# Altium PCB NucleoClone.PcbDoc (part 1 of 3)
Units mm, origin at the board's own origin, x right, y up, seen from the top; angles counter-clockwise.
Board outline 100 x 100 mm, 4 copper layers (Top Layer, Signal Layer 2, Signal Layer 1, Bottom Layer), stack 0.778 mm thick; 118 components, 177 nets, 571 pads, 394 vias.
Unrouted connection lines stored in the file: 5.
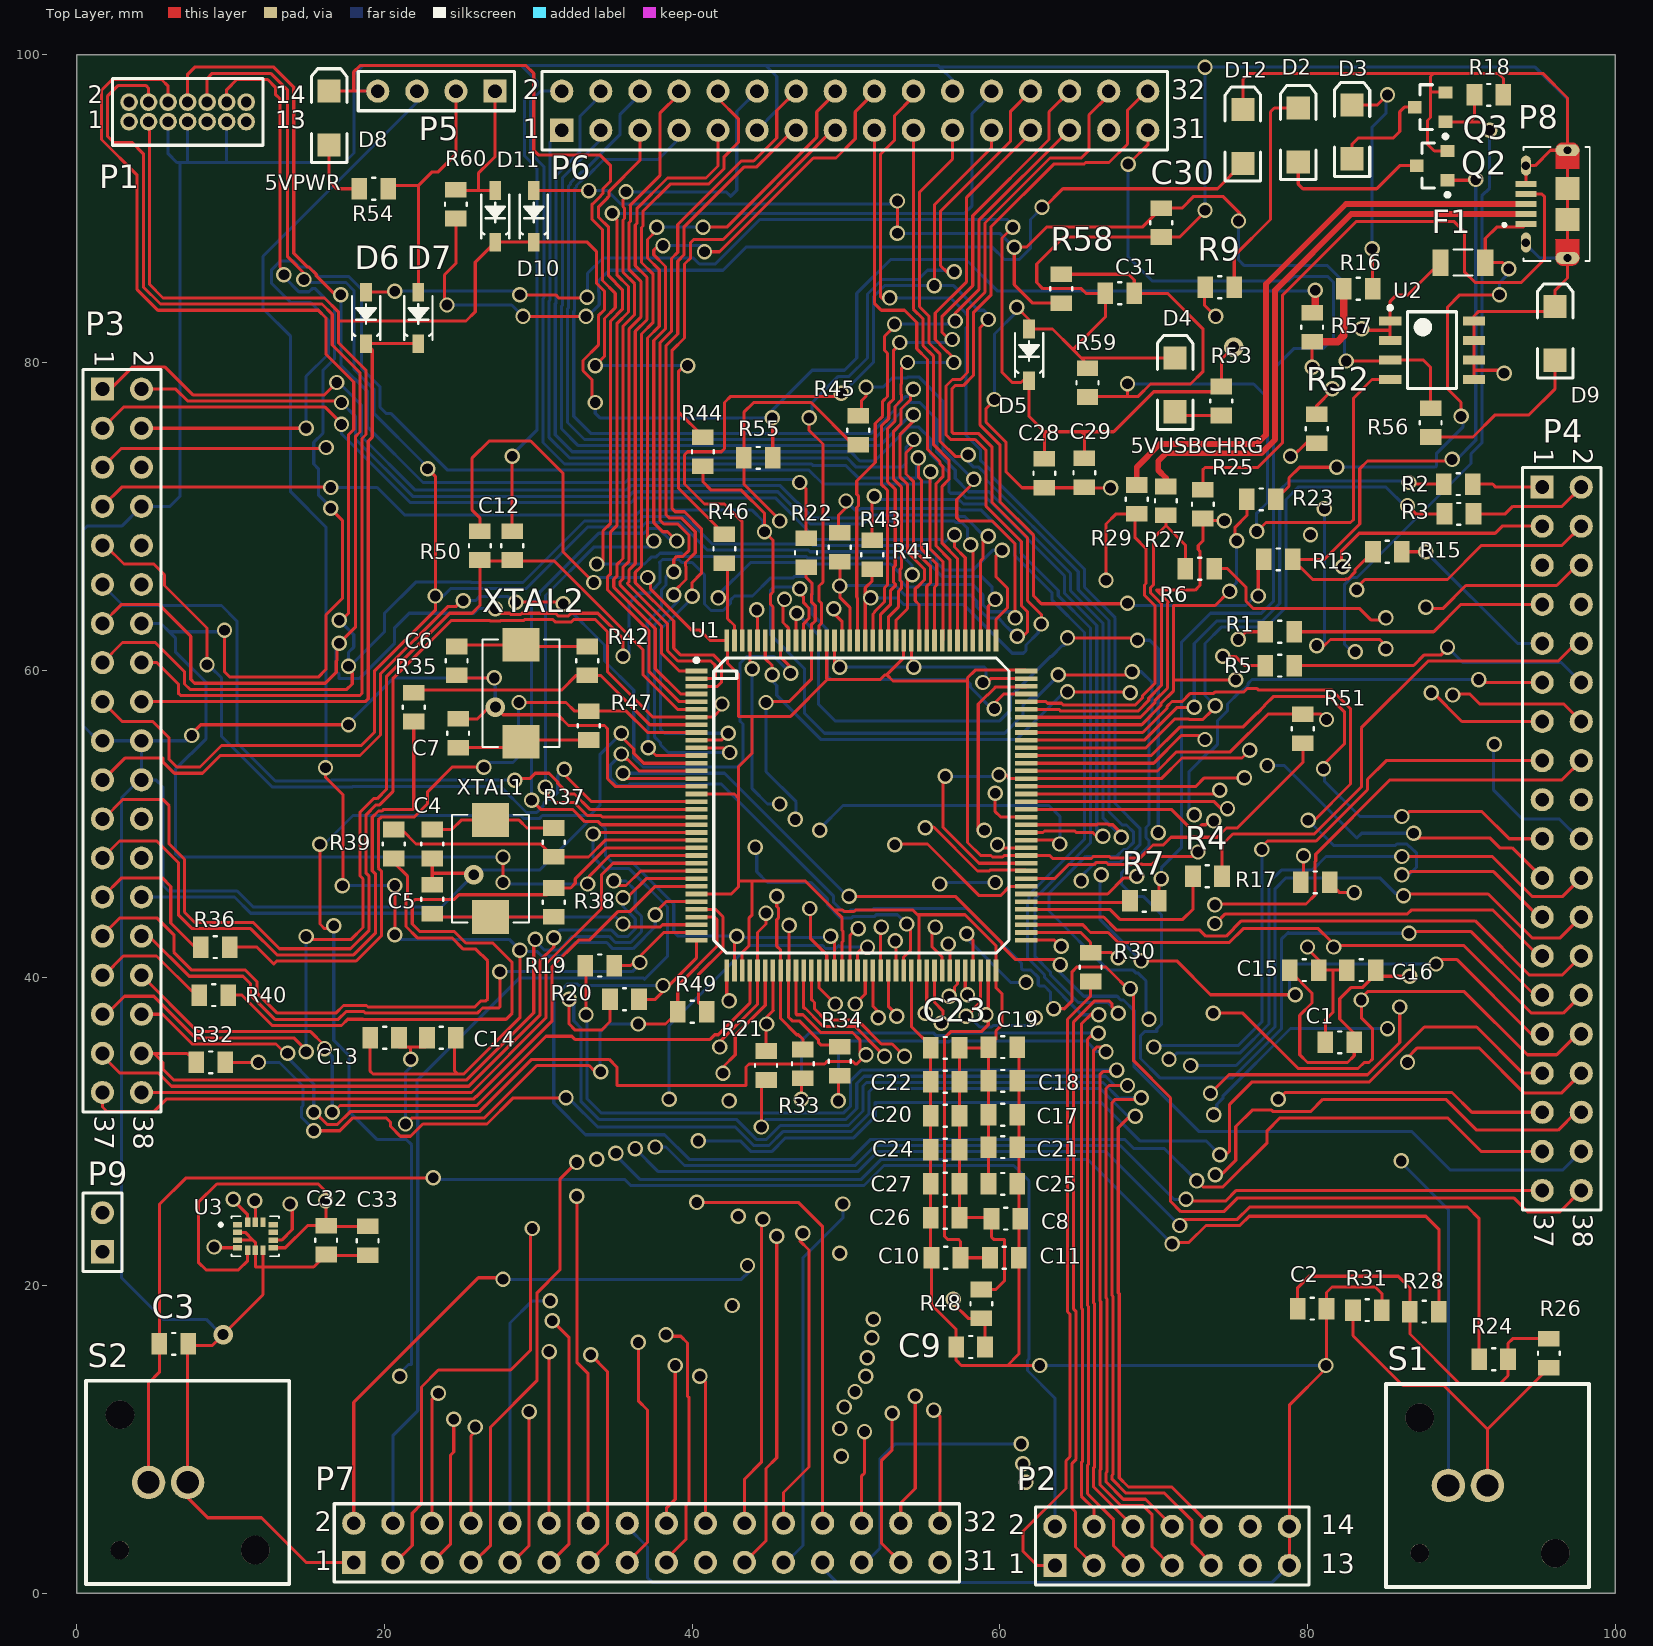
[diagram p0: Top Layer view]
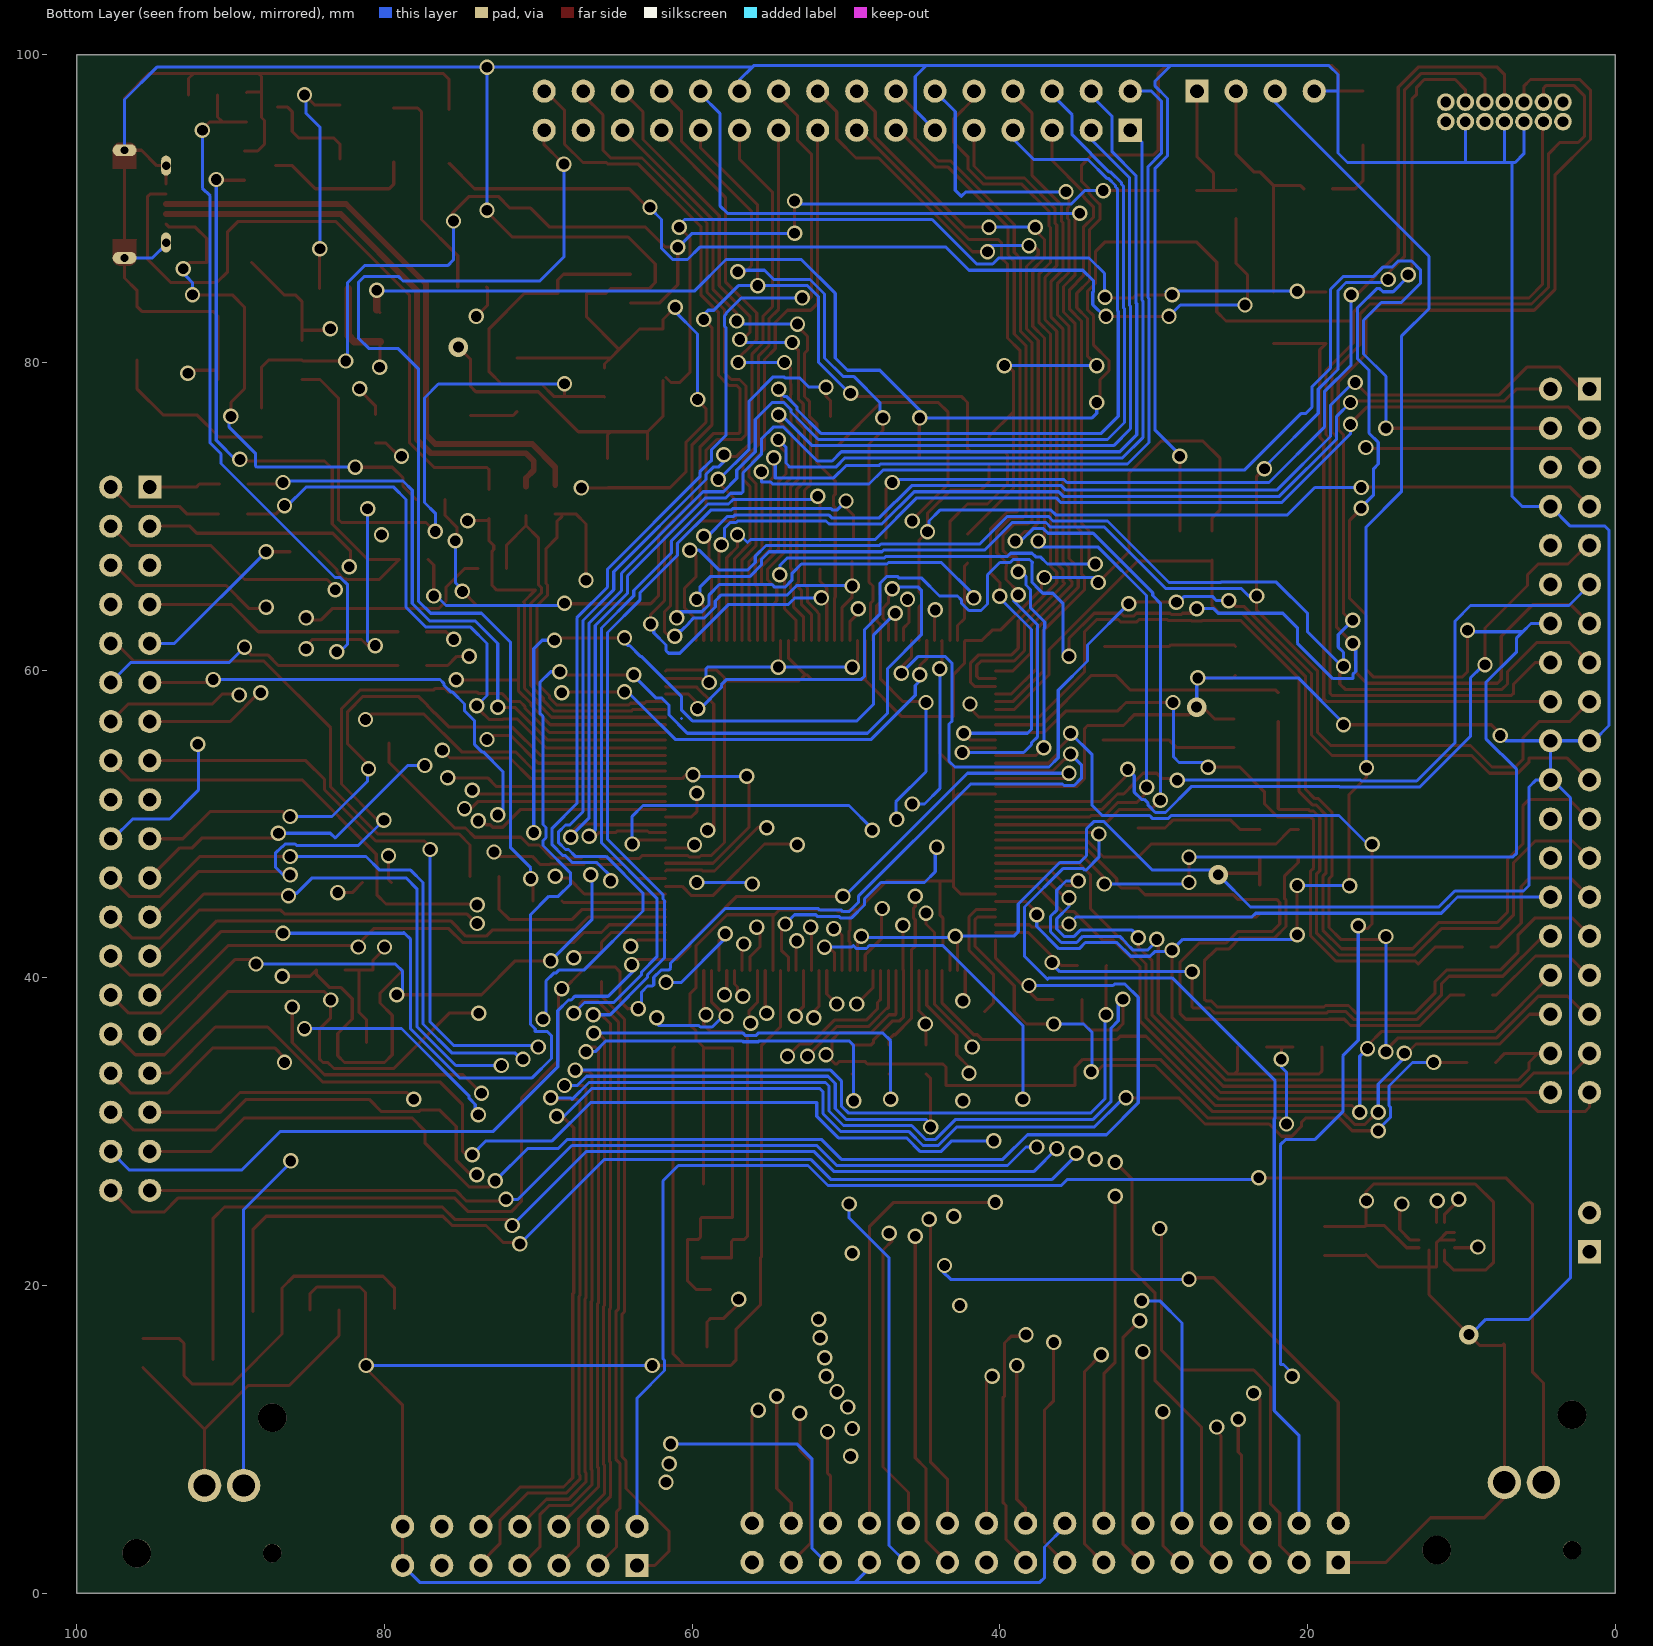
[diagram p1: Bottom Layer view, seen from below]
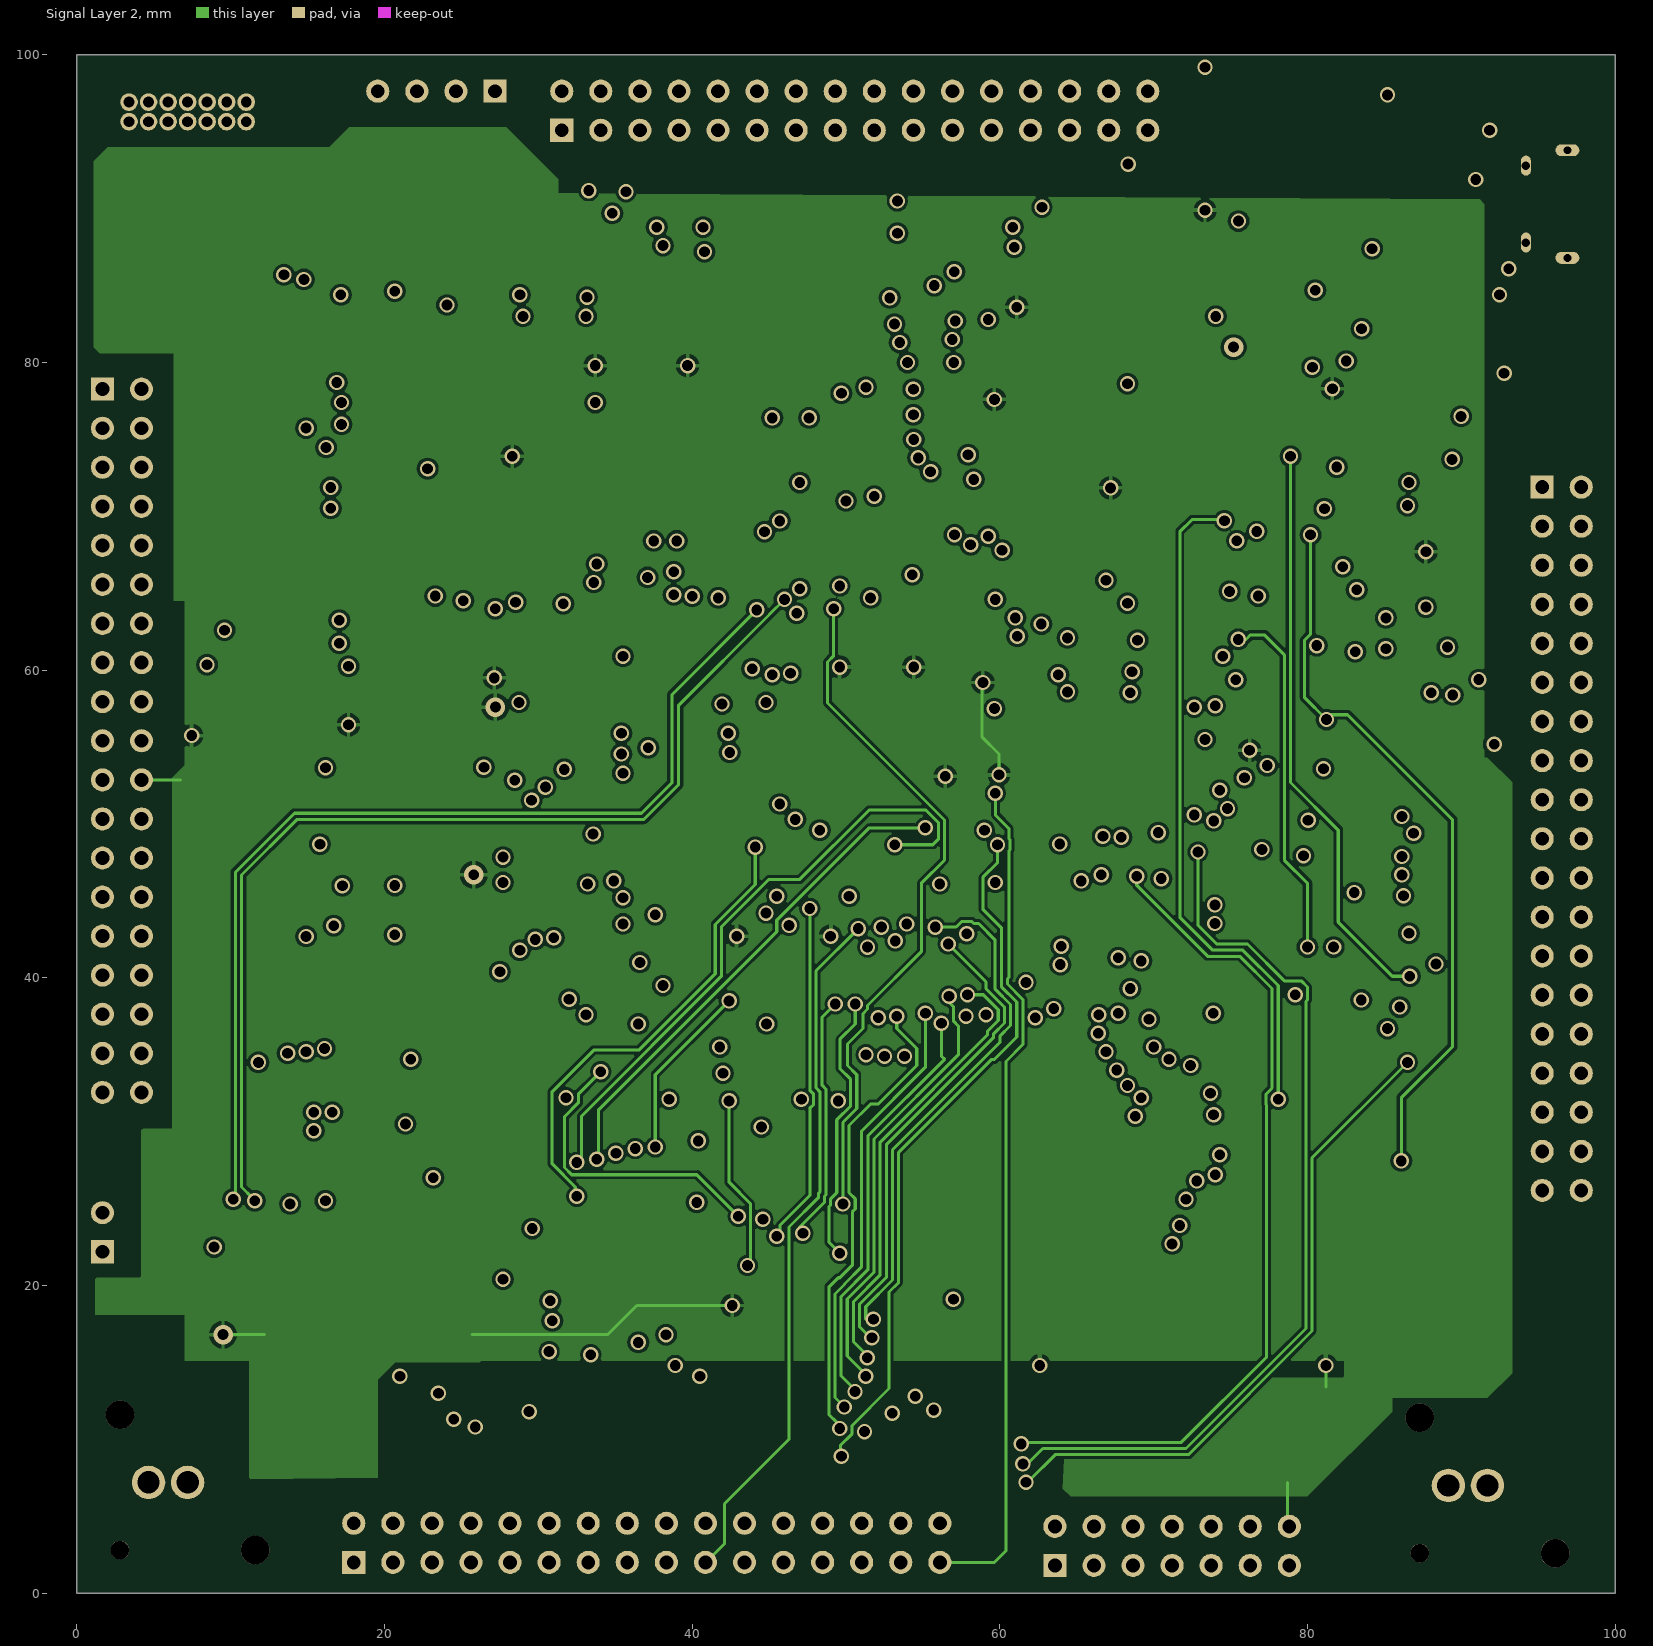
[diagram p2: Signal Layer 2]
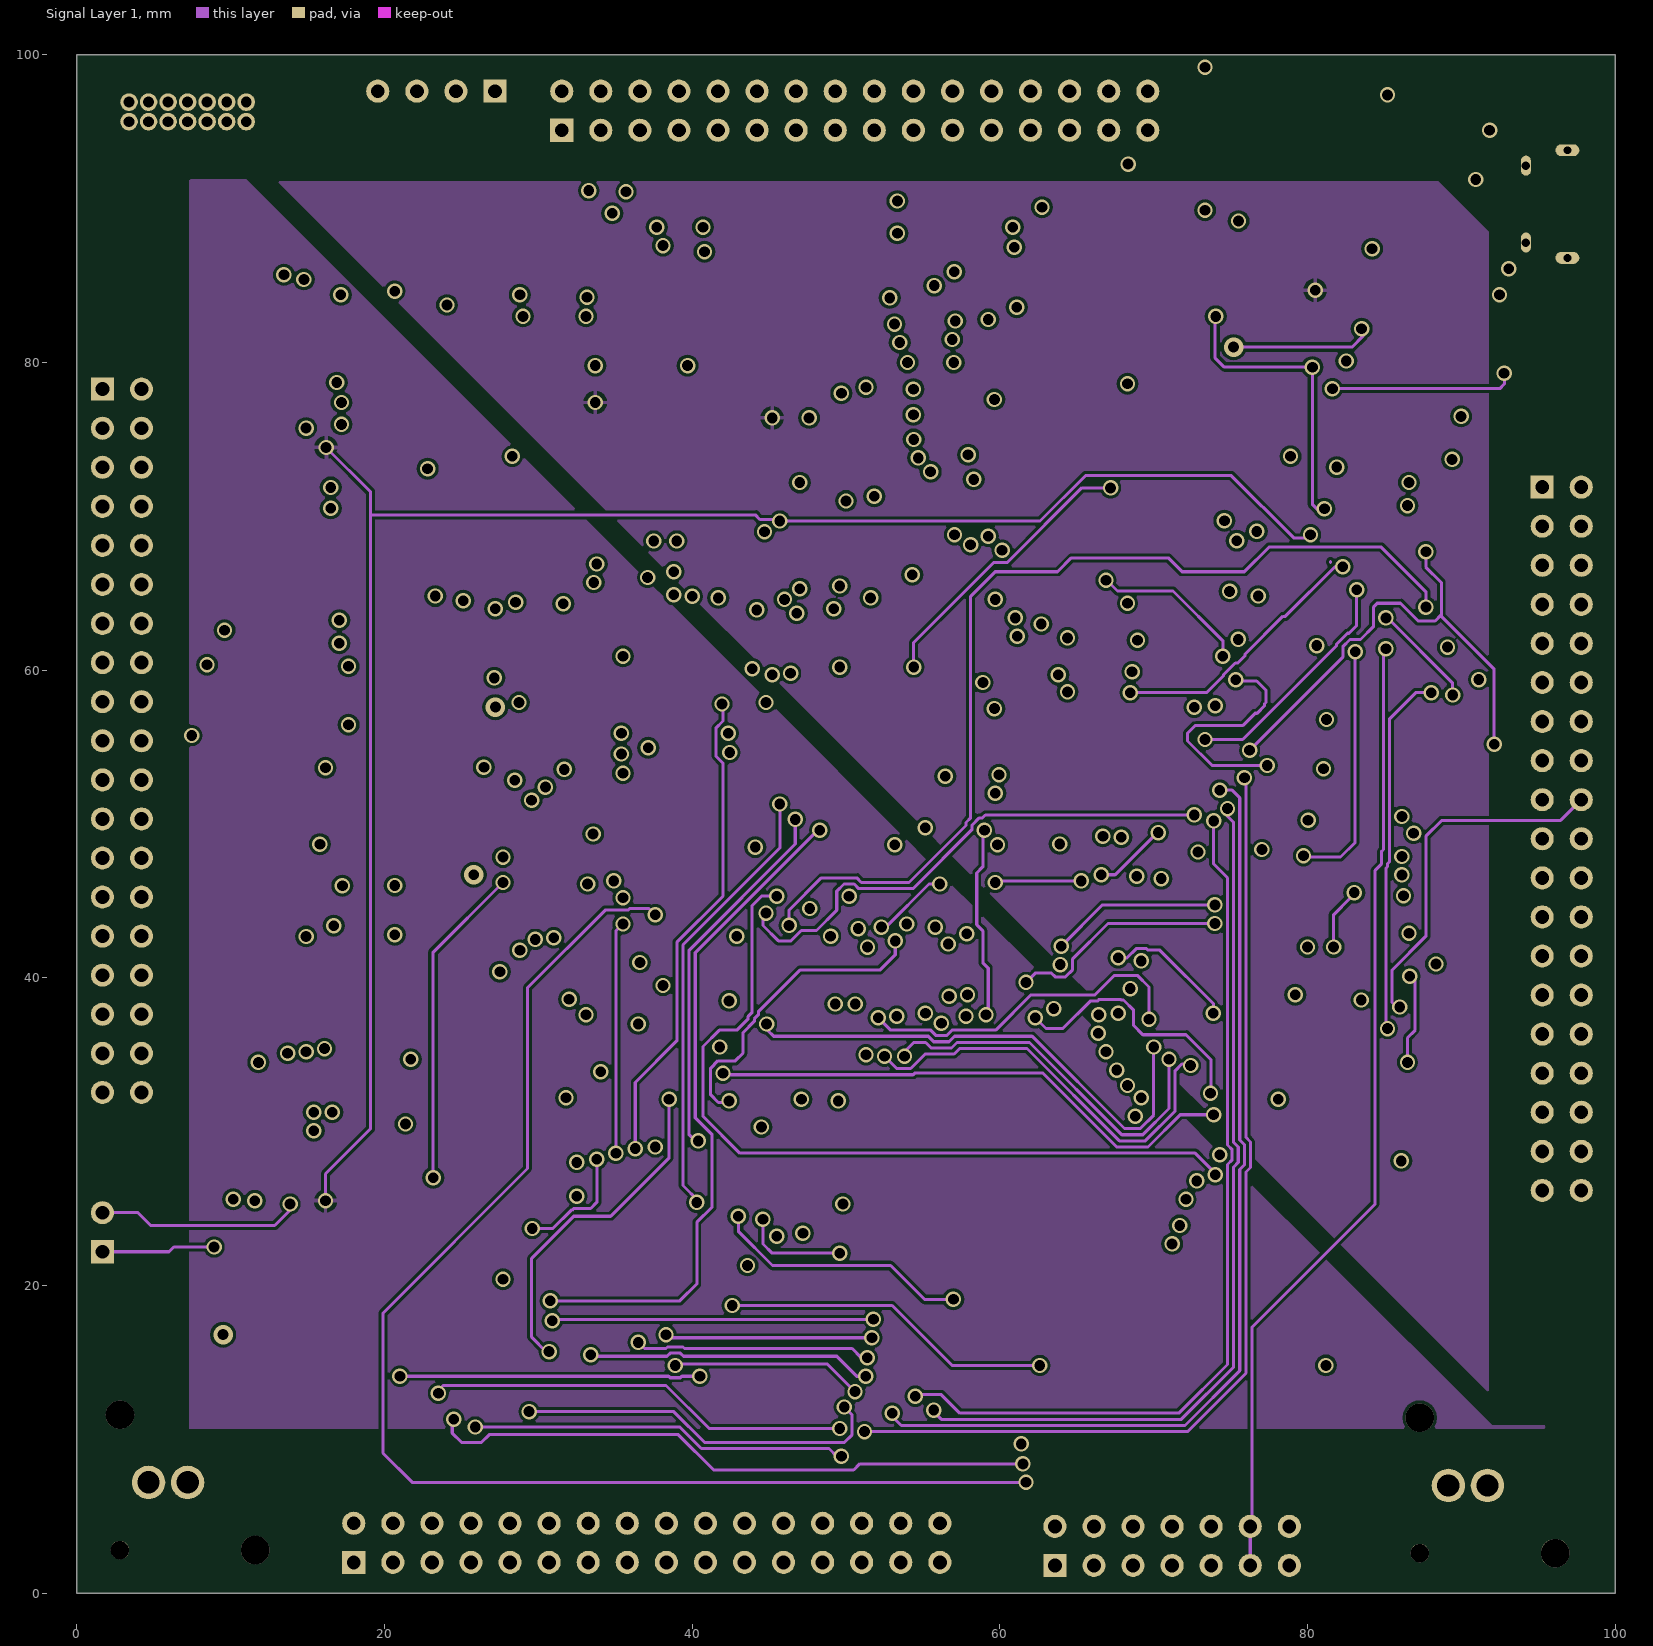
[diagram p3: Signal Layer 1]

## Layer stack, top to bottom
Top Solder: solder mask 0.0102, Solder Resist, Dk 3.5
Top Layer: signal copper 0.0356
Dielectric 1: core 0.254, FR-4, Dk 4.2
Signal Layer 2: signal copper 0.036
Dielectric 3: prepreg 0.127, Dk 4.2
Signal Layer 1: signal copper 0.036
Dielectric 2: core 0.254, Dk 4.2
Bottom Layer: signal copper 0.0356
Bottom Solder: solder mask 0.0102, Solder Resist, Dk 3.5

## Board outline
0,0 100,0 100,100 0,100

## Design rules (kind name [scope] priority, off if disabled: settings)
Clearance [All] p1: gap=0.2 ignorepadtopadclearanceinfootprint=FALSE except(0: Arc-Hole Track-Hole SMDPad-Hole THPad-Hole Via-Hole Fill-Hole Poly-Hole Region-Hole Text-Hole; 0.127: Arc-Arc Arc-Track Arc-SMDPad Arc-THPad Arc-Via Track-Track Track-SMDPad Track-THPad Track-Via SMDPad-SMDPad SMDPad-THPad SMDPad-Via THPad-THPad THPad-Via Via-Via)
DiffPairsRouting [All] p1: maxlimit=0.254 minlimit=0.254 mostfreqgap=0.254 toplayer_minwidth=0.381 toplayer_maxwidth=0.381 toplayer_prefwidth=0.381 midlayer1_minwidth=0.381 midlayer1_maxwidth=0.381 midlayer1_prefwidth=0.381 midlayer2_minwidth=0.381 midlayer2_maxwidth=0.381 midlayer2_prefwidth=0.381 bottomlayer_minwidth=0.381 bottomlayer_maxwidth=0.381 bottomlayer_prefwidth=0.381 maxuncoupledlength=12.7
MinimumSolderMaskSliver [All] p1: minsoldermaskwidth=0.021
PolygonConnect [All] p1: connectstyle=Relief reliefconductorwidth=0.254 reliefentries=4 polygonreliefangle="90 Angle" airgapwidth=0.254
RoomDefinition U_USB [InComponentClass('U_USB')] p1: confinementstyle=ConfineIn formatcopy=TRUE lockcomponents=FALSE outline -25.4,-25.4 25.4,-25.4 25.4,0 -25.4,0
RoomDefinition U_Power_Board [InComponentClass('U_Power_Board')] p2: confinementstyle=ConfineIn formatcopy=TRUE lockcomponents=FALSE outline 102.262,83.648 264.441,83.648 264.441,100.92 102.262,100.92
RoomDefinition U_MCU_144_POWER [InComponentClass('U_MCU_144_POWER')] p3: confinementstyle=ConfineIn formatcopy=TRUE lockcomponents=FALSE outline 0.895,108.1 168.916,108.1 168.916,125.372 0.895,125.372
RoomDefinition U_MCU_144_IOs [InComponentClass('U_MCU_144_IOs')] p4: confinementstyle=ConfineIn formatcopy=TRUE lockcomponents=FALSE outline 102.686,56.529 380.689,56.529 380.689,82.945 102.686,82.945
RoomDefinition U_Connectors [InComponentClass('U_Connectors')] p5: confinementstyle=ConfineIn formatcopy=TRUE lockcomponents=FALSE outline 102.686,0.014 236.925,0.014 236.925,55.259 102.686,55.259
RoutingVias [All] p1: holewidth=0.711 width=1.27 viastyle="Through Hole" minholewidth=0.711 minwidth=1.27 maxholewidth=0.711 maxwidth=1.27
SilkToSilkClearance [All] p1: silktosilkclearance=0.05
SilkToSolderMaskClearance [IsPad] p1: minsilkscreentomaskgap=0.1 clearancetoexposedcopper=TRUE
SolderMaskExpansion [All] p1: expansion=0.102
Width [All] p1: maxlimit=1 minlimit=0.2 preferedwidth=0.2
26 further rules are at their usual default settings.

## Classes and differential pairs
net class PH[0..1]: PH0 PH1
net class PG[0..15]: PG0 PG1 PG2 PG3 PG4 PG5 PG6 PG7 PG8 PG9 PG10 PG11 PG12 PG13 PG14 PG15
net class PF[0..15]: PF0 PF1 PF2 PF3 PF4 PF5 PF6 PF7 PF8 PF9 PF10 PF11 PF12 PF13 PF14 PF15
net class PE[0..15]: PE0 PE1 PE2 PE3 PE4 PE5 PE6 PE7 PE8 PE9 PE10 PE11 PE12 PE13 PE14 PE15
net class PD[0..15]: PD0 PD1 PD2 PD3 PD4 PD5 PD6 PD7 PD8 PD9 PD10 PD11 PD12 PD13 PD14 PD15
net class PC[0..15]: PC0 PC1 PC2 PC3 PC4 PC5 PC6 PC7 PC8 PC9 PC10 PC11 PC12 PC13 PC14 PC15
net class PB[0..15]: PB0 PB1 PB2 PB3 PB4 PB5 PB7 PB8 PB10 PB11 PB12 PB13 PB14 PB15
net class PA[0..15]: PA0 PA1 PA2 PA3 PA4 PA5 PA6 PA7 PA8 PA9 PA10 PA11 PA12 PA13 PA14 PA15
component class U_USB: CN1 P9
component class U_Power_Board: C28 C29 C30 C31 D4 D5 D6 D7 D8 D9 D10 D11 D12 F1 R53 R54 R55 R56 R57 R58 R59 R60 TP2 U2
component class U_MCU_144_POWER: C8 C9 C10 C11 C12 C13 C14 C15 C16 C17 C18 C19 C20 C21 C22 C23 C24 C25 C26 C27 C32 C33 R48 R49 R50 R51 R52
component class U_MCU_144_IOs: C2 C3 C4 C5 C6 C7 HW1 HW2 P9 R19 R20 R21 R22 R23 R24 R25 R26 R27 R28 R29 R30 R31 R32 R33 R34 R35 R36 R37 R38 R39 R40 R41 R42 R43 R44 R45 R46 R47 S1 S2 TP1 U1 U3 XTAL1 XTAL2
component class U_Connectors: C1 D2 D3 P1 P2 P3 P4 P5 P6 P7 Q1 Q2 Q3 R1 R2 R3 R4 R5 R6 R7 R9 R10 R12 R13 R15 R16 R17 R18
differential pair USB_FS: +USB_FS_P -USB_FS_N

## Components (designator, comment, footprint, x,y, rotation, side; value= is the part's Value field where it differs from the comment)
C1 "100nF" 0805 82.1,35.8 r180 top
C2 "100nF" 0805 80.3,18.5 r0 top
C3 "100nF" 0805 6.3,16.2 r180 top
C4 "5.6pF" 0805 23.1,48.7 r270 top
C5 "5.6pF" 0805 23.1,45.1 r90 top
C6 "5.1pF" 0805 24.68,60.6 r270 top
C7 "5.1pF" 0805 24.78,55.9 r90 top
C8 "100nF" 0805 60.4,24.345 r180 top
C9 "100nF" 0805 58.1,16 r0 top
C10 "2.2uF" 0805 56.5,21.8 r0 top
C11 "2.2uF" 0805 60.3,21.8 r180 top
C12 "1uF" 0805 28.3,68.1 r270 top
C13 "1uF" 0805 20,36.1 r0 top
C14 "100nF" 0805 23.7,36.1 r180 top
C15 "1uF" 0805 79.8,40.5 r0 top
C16 "100nF" 0805 83.5,40.5 r180 top
C17 "4.7uF" 0805 60.2,31.1 r180 top
C18 "100nF" 0805 60.2,33.3 r180 top
C19 "100nF" 0805 60.2,35.5 r180 top
C20 "100nF" 0805 56.443,31.029 r0 top
C21 "100nF" 0805 60.2,29 r180 top
C22 "100nF" 0805 56.443,33.238 r0 top
C23 "100nF" 0805 56.443,35.446 r0 top
C24 "100nF" 0805 56.443,28.821 r0 top
C25 "100nF" 0805 60.2,26.6 r180 top
C26 "100nF" 0805 56.443,24.405 r0 top
C27 "100nF" 0805 56.443,26.613 r0 top
C28 "1nF" 0805 62.9,72.8 r90 top
C29 "1uF" 0805 65.5,72.84 r270 top
C30 "2.2uF" 0805 70.5,89.1 r90 top
C31 "470pF" 0805 67.8,84.5 r0 top
C32 "100nF" 0805 16.2,22.95 r90 top
C33 "100nF" 0805 18.9,22.9 r90 top
D2 "LED2" 3.2X1.6X1.1 79.4,94.8 r90 top
D3 "LED2" 3.2X1.6X1.1 82.9,95 r90 top
D4 "LED2" 3.2X1.6X1.1 71.4,78.55 r90 top
D5 "MMSZ5245B-TP" SOD-123 61.9,80.5 r90 top
D6 "SM5817PL-TP" SOD-123 18.8,82.9 r90 top
D7 "SM5817PL-TP" SOD-123 22.2,82.9 r90 top
D8 "LED2" 3.2X1.6X1.1 16.4,95.9 r90 top
D9 "LED2" 3.2X1.6X1.1 96.1,81.9 r90 top
D10 "SM5817PL-TP" SOD-123 29.7,89.5 r90 top
D11 "SM5817PL-TP" SOD-123 27.2,89.5 r90 top
D12 "LED2" 3.2X1.6X1.1 75.8,94.7 r90 top
F1 "Fuse 3A 1206" 1206 90.1,86.5 r180 top
P1 "FTSH-107-01-L-D-K" "CN HDR JTAG" 7.2,96.3 r0 top
P2 "Header 7X2" HDR2X7 63.58,1.8 r0 top
P3 "Header 19X2" HDR2X19 1.66,78.27 r270 top
P4 "Header 19X2" HDR2X19 95.26,71.9 r270 top
P5 "Header 4" HDR1X4 27.18,97.64 r180 top
P6 "Header 16X2" HDR2X16 31.52,95.1 r0 top
P7 "Header 16X2" HDR2X16 18,2 r0 top
P8 "10118194-0001LF" "USB Micro B Receptacle" 96.89,90.3 r90 top
P9 "Header 2" HDR1X2 1.66,22.19 r90 top
Q2 "BSR14" ONSC-SOT-23-3-318-08_V 88.1,92.8 r180 top
Q3 "BSR14" ONSC-SOT-23-3-318-08_V 87.97,96.6 r180 top
R1 "JUMPER" 0805 78.2,62.5 r0 top value=0
R2 "JUMPER" 0805 89.8,72.1 r180 top value=0
R3 "JUMPER" 0805 89.85,70.16 r0 top value=0
R4 "JUMPER" 0805 73.5,46.6 r0 top value=0
R5 "JUMPER" 0805 78.2,60.3 r0 top value=0
R6 "JUMPER" 0805 73,66.6 r0 top value=0
R7 "JUMPER" 0805 69.4,45 r180 top value=0
R9 "270" 0805 74.3,84.9 r0 top
R12 "47k" 0805 78.1,67.2 r180 top
R15 "100k" 0805 85.2,67.7 r0 top
R16 "270" 0805 83.3,84.8 r0 top
R17 "47k" 0805 80.5,46.2 r0 top
R18 "100k" 0805 91.8,97.4 r0 top
R19 "JUMPER" 0805 34,40.8 r180 top value=0
R20 "JUMPER" 0805 35.6,38.6 r180 top value=0
R21 "JUMPER" 0805 44.8,34.3 r270 top value=0
R22 "JUMPER" 0805 47.4,67.64 r270 top value=0
R23 "JUMPER" 0805 77,71.1 r0 top value=0
R24 "JUMPER" 0805 92.1,15.2 r180 top value=0
R25 "JUMPER" 0805 73.2,70.8 r90 top value=0
R26 "330" 0805 95.7,15.6 r90 top
R27 "JUMPER" 0805 70.8,71 r90 top value=0
R28 "JUMPER" 0805 87.6,18.3 r0 top value=0
R29 "JUMPER" 0805 68.9,71.1 r90 top value=0
R30 "JUMPER" 0805 65.9,40.7 r90 top value=0
R31 "100k" 0805 83.9,18.4 r0 top
R32 "JUMPER" 0805 8.7,34.5 r0 top value=0
R33 "JUMPER" 0805 47.2,34.4 r270 top value=0
R34 "JUMPER" 0805 49.6,34.568 r270 top value=0
R35 "JUMPER" 0805 21.9,57.6 r270 top value=0
R36 "JUMPER" 0805 9,42 r180 top value=0
R37 "JUMPER" 0805 31,48.8 r270 top value=0
R38 "JUMPER" 0805 31,44.9 r90 top value=0
R39 "JUMPER" 0805 20.6,48.7 r90 top value=0
R40 "JUMPER" 0805 8.9,38.88 r0 top value=0
R41 "JUMPER" 0805 51.7,67.5 r90 top value=0
R42 "JUMPER" 0805 33.18,60.6 r270 top value=0
R43 "JUMPER" 0805 49.6,68 r90 top value=0
R44 "10k" 0805 40.7,74.2 r270 top
R45 "10k" 0805 50.8,75.6 r90 top
R46 "10k" 0805 42.1,67.9 r270 top
R47 "JUMPER" 0805 33.28,56.4 r90 top value=0
R48 "JUMPER" 0805 58.8,18.8 r90 top value=0
R49 "JUMPER" 0805 40,37.8 r180 top value=0
R50 "JUMPER" 0805 26.2,68.1 r90 top value=0
R51 "JUMPER" 0805 79.7,56.2 r90 top value=0
R52 "JUMPER" 0805 80.6,75.7 r90 top value=0
R53 "270" 0805 74.4,77.5 r90 top
R54 "270" 0805 19.3,91.3 r0 top
R55 "JUMPER" 0805 44.3,73.8 r0 top value=0
R56 "182" 0805 88,76.1 r90 top
R57 "JUMPER" 0805 80.3,82.3 r90 top value=0
R58 "100k" 0805 64,84.8 r90 top
R59 "165k" 0805 65.7,78.7 r90 top
R60 "182" 0805 24.64,90.3 r90 top
S1 "SPST-NO 0.3A 28V" PB300STQ 91.7,7 r0 top
S2 "SPST-NO 0.3A 28V" PB300STQ 7.2,7.2 r0 top
U1 "STM32H743ZI" STM32H7 51,51.2 r0 top
U2 "LDO" "REG LIN POS ADJ 500MA 8SOIC" 88.1,80.8 r0 top
U3 "LSM6DSLTR" LGA-14 11.6,23.2 r0 top
XTAL1 "CRYSTAL 25.0000MHZ 8PF SMD" SMD-2 26.888,47.1 r90 top
XTAL2 "CRYSTAL 32.7680KHZ 12.5PF SMD" SMD-2 28.88,58.5 r90 top

## Footprints (in the part's own frame and the unit in brackets; to place one, negate y for a bottom-side part, rotate by r counter-clockwise, add the part's x,y. Pads: shape width x height; smd on the part's side, far side on the other; paste and mask are expansions set on the pad)
3.2X1.6X1.1 [mm]
  rect 1.5x1.5 smd: 1(-1.75,0) 2(1.75,0)
  silkscreen extent -2.9,-1.15 3.2,1.15
0805 [mil]
  rect 40x55 smd: 1(-37,0) 2(37,0)
  silkscreen extent -4,-28 4,28
1206 [mm]
  rect 1.05x1.72 smd: 1(-1.46,0) 2(1.46,0)
  silkscreen extent -0.62,-0.85 0.62,0.85
"CN HDR JTAG" [mil] "CONN HEADER VERT 14POS 1.27MM"
  round 45 hole 27.95: 1(-150,-25.39) 2(-150,24.61) 3(-100,-25.39) 4(-100,24.61) 5(-50,-25.39) 6(-50,24.61) 7(0,-25.39) 8(0,24.61) 9(50,-25.39) 10(50,24.61) 11(100,-25.39) 12(100,24.61) 13(150,-25.39) 14(150,24.61)
  silkscreen extent -193,-86 193,85, body extent -175,-68 175,67, height 249
HDR1X2 [mm] "Connector; Header; 2 Position"
  rect 1.5x1.5 hole 0.9: 1(0,0)
  round 1.5 hole 0.9: 2(2.54,0)
  silkscreen extent -1.27,-1.27 3.81,1.27
HDR1X4 [mm] "Connector; Header; 4 Position"
  rect 1.5x1.5 hole 0.9: 1(0,0)
  round 1.5 hole 0.9: 2(2.54,0) 3(5.08,0) 4(7.62,0)
  silkscreen extent -1.27,-1.27 8.89,1.27
HDR2X7 [mm] "Connector; Header; 7x2 Position"
  rect 1.5x1.5 hole 0.9: 1(0,0)
  round 1.5 hole 0.9: 2(0,2.54) 3(2.54,0) 4(2.54,2.54) 5(5.08,0) 6(5.08,2.54) 7(7.62,0) 8(7.62,2.54) 9(10.16,0) 10(10.16,2.54) 11(12.7,0) 12(12.7,2.54) 13(15.24,0) 14(15.24,2.54)
  silkscreen extent -1.27,-1.27 16.51,3.81
HDR2X16 [mm] "Connector; Header; 16x2 Position"
  rect 1.5x1.5 hole 0.9: 1(0,0)
  round 1.5 hole 0.9: 2(0,2.54) 3(2.54,0) 4(2.54,2.54) 5(5.08,0) 6(5.08,2.54) 7(7.62,0) 8(7.62,2.54) 9(10.16,0) 10(10.16,2.54) 11(12.7,0) 12(12.7,2.54) 13(15.24,0) 14(15.24,2.54) 15(17.78,0) 16(17.78,2.54) 17(20.32,0) 18(20.32,2.54) 19(22.86,0) 20(22.86,2.54) 21(25.4,0) 22(25.4,2.54) 23(27.94,0) 24(27.94,2.54) 25(30.48,0) 26(30.48,2.54) 27(33.02,0) 28(33.02,2.54) 29(35.56,0) 30(35.56,2.54) 31(38.1,0) 32(38.1,2.54)
  silkscreen extent -1.27,-1.27 39.37,3.81
HDR2X19 [mm] "Connector; Header; 19x2 Position"
  rect 1.5x1.5 hole 0.9: 1(0,0)
  round 1.5 hole 0.9: 2(0,2.54) 3(2.54,0) 4(2.54,2.54) 5(5.08,0) 6(5.08,2.54) 7(7.62,0) 8(7.62,2.54) 9(10.16,0) 10(10.16,2.54) 11(12.7,0) 12(12.7,2.54) 13(15.24,0) 14(15.24,2.54) 15(17.78,0) 16(17.78,2.54) 17(20.32,0) 18(20.32,2.54) 19(22.86,0) 20(22.86,2.54) 21(25.4,0) 22(25.4,2.54) 23(27.94,0) 24(27.94,2.54) 25(30.48,0) 26(30.48,2.54) 27(33.02,0) 28(33.02,2.54) 29(35.56,0) 30(35.56,2.54) 31(38.1,0) 32(38.1,2.54) 33(40.64,0) 34(40.64,2.54) 35(43.18,0) 36(43.18,2.54) 37(45.72,0) 38(45.72,2.54)
  silkscreen extent -1.27,-1.27 46.99,3.81
LGA-14 [mm]
  rect 0.61x0.35 smd: 1(-1.16,0.75) 2(-1.16,0.25) 3(-1.16,-0.25) 4(-1.16,-0.75) 8(1.16,-0.75) 9(1.16,-0.25) 10(1.16,0.25) 11(1.16,0.75)
  rect 0.35x0.61 smd: 5(-0.5,-0.91) 6(0,-0.91) 7(0.5,-0.91) 12(0.5,0.91) 13(0,0.91) 14(-0.5,0.91)
  silkscreen extent -2.35,-1.3 1.55,1.3
ONSC-SOT-23-3-318-08_V [mm] "SOT23, 3-Leads, Body 2.92x1.3mm, Pitch 0.95mm"
  rect 0.9x0.8 smd: 1(-1,0.95) 2(-1,-0.95) 3(1,0)
  silkscreen extent -1.13,-1.46 0.65,2.02, body extent -0.65,-1.46 0.65,1.46, height 1.11
PB300STQ [mm] "SWITCH PUSH SPST-NO 0.3A 28V"
  round 2.175 hole 1.45: 1(0,0) 2(-2.54,0)
  round 1.86 hole 1.86 unplated: 3(-4.4,4.4) 5(4.4,-4.4)
  round 1.2 hole 1.2 unplated: 4(-4.4,-4.4)
  silkscreen extent -6.6,-6.6 6.6,6.6, body extent -6.2,-6.2 6.2,6.2, height 10.35
"REG LIN POS ADJ 500MA 8SOIC" [mm] "Linear Voltage Regulator IC  1 Output  500mA 8-SOIC"
  rect 1.45x0.6 smd: ADJ(-2.725,-1.905) EN(-2.725,1.905) GND(2.725,-1.905) GND(2.725,-0.635) GND(2.725,0.635) GND(2.725,1.905) IN(-2.725,0.635) OUT(-2.725,-0.635)
  silkscreen extent -2.85,-2.5 1.6,2.88, body extent -2,-2.5 2,2.5, height 1.75
SMD-2 [mm]
  rect 2.2x2.4 smd: 1(-3.15,0) 2(3.15,0)
  silkscreen extent -3.5,-2.5 3.5,2.5
SOD-123 [mil]
  rect 48x30 smd: A(66,0) C(-66,0)
  silkscreen extent -56,-36 56,36
STM32H7 [mm] "STM32H743ZI 144 pin"
  rect 0.3x1.45 smd: BOOT0(-5.75,10.725) PA3(-8.75,-10.725) PA4(-7.25,-10.725) PA5(-6.75,-10.725) PA6(-6.25,-10.725) PA7(-5.75,-10.725) PA14(8.75,10.725) PA15(8.25,10.725) PB0(-4.25,-10.725) PB1(-3.75,-10.725) PB2(-3.25,-10.725) PB3(-3.25,10.725) PB4(-3.75,10.725) PB5(-4.25,10.725) PB6(-4.75,10.725) PB7(-5.25,10.725) PB8(-6.25,10.725) PB9(-6.75,10.725) PB10(7.25,-10.725) PB11(7.75,-10.725) PC4(-5.25,-10.725) PC5(-4.75,-10.725) PC10(7.75,10.725) PC11(7.25,10.725) PC12(6.75,10.725) PD0(6.25,10.725) PD1(5.75,10.725) PD2(5.25,10.725) PD3(4.75,10.725) PD4(4.25,10.725) PD5(3.75,10.725) PD6(2.25,10.725) PD7(1.75,10.725) PDR_ON(-8.25,10.725) PE0(-7.25,10.725) PE1(-7.75,10.725) PE7(1.75,-10.725) PE8(2.25,-10.725) PE9(2.75,-10.725) PE10(4.25,-10.725) PE11(4.75,-10.725) PE12(5.25,-10.725) PE13(5.75,-10.725) PE14(6.25,-10.725) PE15(6.75,-10.725) PF11(-2.75,-10.725) PF12(-2.25,-10.725) PF13(-0.75,-10.725) PF14(-0.25,-10.725) PF15(0.25,-10.725) PG0(0.75,-10.725) PG1(1.25,-10.725) PG9(1.25,10.725) PG10(0.75,10.725) PG11(0.25,10.725) PG12(-0.25,10.725) PG13(-0.75,10.725) PG14(-1.25,10.725) PG15(-2.75,10.725) VCAP(8.25,-10.725) VDD(-8.75,10.725) VDD(-7.75,-10.725) VDD(-2.25,10.725) VDD(-1.25,-10.725) VDD(2.75,10.725) VDD(3.75,-10.725) VDD(8.75,-10.725) VSS(-8.25,-10.725) VSS(-1.75,-10.725) VSS(-1.75,10.725) VSS(3.25,-10.725) VSS(3.25,10.725)
  rect 1.45x0.3 smd: NRST(-10.725,-3.25) PA0(-10.725,-7.75) PA1(-10.725,-8.25) PA2(-10.725,-8.75) PA8(10.725,4.75) PA9(10.725,5.25) PA10(10.725,5.75) PA11(10.725,6.25) PA12(10.725,6.75) PA13(10.725,7.25) PB12(10.725,-8.75) PB13(10.725,-8.25) PB14(10.725,-7.75) PB15(10.725,-7.25) PC0(-10.725,-3.75) PC1(-10.725,-4.25) PC2(-10.725,-4.75) PC3(-10.725,-5.25) PC6(10.725,2.75) PC7(10.725,3.25) PC8(10.725,3.75) PC9(10.725,4.25) PC13(-10.725,5.75) PC14(-10.725,5.25) PC15(-10.725,4.75) PD8(10.725,-6.75) PD9(10.725,-6.25) PD10(10.725,-5.75) PD11(10.725,-5.25) PD12(10.725,-4.75) PD13(10.725,-4.25) PD14(10.725,-2.75) PD15(10.725,-2.25) PE2(-10.725,8.75) PE3(-10.725,8.25) PE4(-10.725,7.75) PE5(-10.725,7.25) PE6(-10.725,6.75) PF0(-10.725,4.25) PF1(-10.725,3.75) PF2(-10.725,3.25) PF3(-10.725,2.75) PF4(-10.725,2.25) PF5(-10.725,1.75) PF6(-10.725,0.25) PF7(-10.725,-0.25) PF8(-10.725,-0.75) PF9(-10.725,-1.25) PF10(-10.725,-1.75) PG2(10.725,-1.75) PG3(10.725,-1.25) PG4(10.725,-0.75) PG5(10.725,-0.25) PG6(10.725,0.25) PG7(10.725,0.75) PG8(10.725,1.25) PH0(-10.725,-2.25) PH1(-10.725,-2.75) VBAT(-10.725,6.25) VCAP(10.725,7.75) VDD(-10.725,-5.75) VDD(-10.725,0.75) VDD(10.725,-3.25) VDD(10.725,8.75) VDD33USB(10.725,2.25) VDDA(-10.725,-7.25) VREF+(-10.725,-6.75) VSS(-10.725,1.25) VSS(10.725,-3.75) VSS(10.725,1.75) VSS(10.725,8.25) VSSA(-10.725,-6.25)
  silkscreen extent -10.85,-9.6 9.6,9.6, body extent -10,-10 10,10, height 1.6
"USB Micro B Receptacle" [mm] "CONN RCPT USB2.0 MICRO B SMD R/A"
  rect 0.4x1.35 smd: 1(-1.3,2.69) 2(-0.65,2.69) 3(0,2.69) 4(0.65,2.69) 5(1.3,2.69)
  oval 1.3x0.65 hole 0.55: S1(-2.5,2.69) S2(2.5,2.69)
  oval 0.775x1.55 hole 0.5: S3(-3.5,-0.01) S6(3.5,-0.01)
  rect 1.5x1.55 smd: S4(-1,-0.01) S5(1,-0.01)
  Top Layer region: 194 vertices and 0 holes, not listed, extent -4,-0.785 -2.3,0.77
  Top Layer region: 194 vertices and 0 holes, not listed, extent 2.3,-0.79 4,0.765
  silkscreen extent -3.7,-1.46 3.7,4.19, body extent -4,-2.74 4.04,2.79, height 2.87

## Part data
C1 C2 C3 C8 C9 C14 C16 C18 C19 C20 C21 C22 C23 C24 C25 C26 C27 C32 C33: library part "CAP 100nF 0805", "CAP CER 0.1UF 50V X7R 0805", Package=0805, Rating=50V, Tolerance=10%, Digikey=311-1140-1-ND, Digikey Link=https://www.digikey.ca/products/en?keywords=311-1140-1-ND, MF=Yageo, MP=CC0805KRX7R9BB104, Price="0,119 CAD"
C4 C5: library part "CAP 5.6pF 0805", "CAP CER 5.6PF 50V C0G/NP0 0805", Package=0805, Rating=50V, Tolerance=5%, Digikey=399-9261-1-ND, Digikey Link=https://www.digikey.ca/product-detail/en/kemet/C0805C569D5GACTU/399-9261-1-ND/3522779, MF=KEMET, MP=C0805C569D5GACTU, Price="0,249 CAD"
C6 C7: library part "CAP 5.1pF 0805", "CAP CER 5.1PF 630V NP0 0805", Package=0805, Rating=50V, Tolerance=10%, Digikey=399-16524-1-ND, Digikey Link=https://www.digikey.ca/product-detail/en/kemet/C0805C519KBGAC7800/399-16524-1-ND/7917337, MF=KEMET, MP=C0805C519KBGAC7800, Price="0,493 CAD"
C10 C11 C30: library part "CAP 2.2uF 0805", "CAP CER 1UF 50V X7R 0805", Package=0805, Rating=16V, Tolerance=10%, Digikey=399-3523-1-ND, Digikey Link=https://www.digikey.ca/products/en?keywords=399-3523-1-ND, MF=KEMET, MP=C0805C225K4RACTU, Price="0,461 CAD"
C12 C13 C15 C29: library part "CAP 1uF 0805", "CAP CER 1UF 50V X7R 0805", Package=0805, Rating=50V, Tolerance=10%, Digikey=1276-1029-1-ND, Digikey Link=https://www.digikey.ca/product-detail/en/samsung-electro-mechanics/CL21B105KBFNNNE/1276-1029-1-ND/3889115, MF="Samsung Electro-Mechanics", MP=CL21B105KBFNNNE, Price="0,172 CAD"
C17: library part "CAP 4.7uF 0805", "CAP CER 4.7UF 25V X5R 0805", Package=0805, Rating=16V, Temperature Coefficient=X7R, Tolerance=10%, Digikey=1276-2873-1-ND, Digikey Link=https://www.digikey.ca/product-detail/en/samsung-electro-mechanics/CL21B475KOFNNNE/1276-2873-1-ND/3890959, MF="Samsung Electro-Mechanics", MP=CL21B475KOFNNNE, Price="0,49 CAD"
C28: library part "CAP 1nF 0805", "CAP CER 1000PF 50V X7R 0805", Package=0805, Rating=50V, Tolerance=10%, Digikey=311-1127-1-ND, Digikey Link=https://www.digikey.ca/products/en?keywords=311-1127-1-ND, MF=Yageo, MP=CC0805KRX7R9BB102, Price="0.1 CAD"
C31: library part "CAP 470pF 0805", "CAP CER 470PF 50V C0G/NPO 0805", Package=0805, Rating=50V, Tolerance=5%, Digikey=311-1119-1-ND, Digikey Link=https://www.digikey.ca/products/en?keywords=311-1119-1-ND, MF=Yageo, MP=CC0805JRNPO9BN471, Price="0,135 CAD"
D2 D4 D8 D9 D12: library part "LED GREEN SMD", "Typical RED, GREEN, YELLOW, AMBER GaAs LED", Package=0603, Rating=2V, Digikey=160-1446-1-ND, Digikey Link=https://www.digikey.ca/products/en?keywords=160-1446-1-ND, MF="Lite-On Inc.", MP=LTST-C191KGKT
D3: library part "LED RED SMD", "Typical RED, GREEN, YELLOW, AMBER GaAs LED", Package=0603, Rating=1.8V, Digikey=160-1181-1-ND, Digikey Link=https://www.digikey.ca/products/en?keywords=160-1181-1-ND, MF="Lite-On Inc.", MP=LTST-C190CKT
D5: "Zener Diode 15V 500mW ±5% Surface Mount SOD-123", Package="SOD-123 ON Semiconductor", Availability=Unavailable, ComponentLink1Description=digikey, ComponentLink1URL=https://www.digikey.ca/en/products/detail/micro-commercial-co/MMSZ5245B-TP/1793206, MF="ON Semiconductor", MP=MMSZ5224BT1G, Price=None, SnapEDA_Link=https://www.snapeda.com/parts/MMSZ5224BT1G/ON%20Semiconductor/view-part/230941/?ref=snap
D6 D7 D10 D11: "Diode Schottky 20V 1A Surface Mount SOD-123FL", Current Rating=1A, Package=SOD-123, Voltage Rating=20V, ComponentLink1Description=digikey, ComponentLink1URL=https://www.digikey.ca/product-detail/en/on-semiconductor/MBR0540T1G/MBR0540T1GOSCT-ND/917967, Digikey=SM5817PL-TPMSCT-ND, Digikey Link=https://www.digikey.ca/product-detail/en/micro-commercial-co/SM5817PL-TP/SM5817PL-TPMSCT-ND/1793410, MF="Micro Commercial Co", MP=SM5817PL-TP
F1: "FUSE 3.0A 63VAC/DC SLOW 1206", Rating=3A, Digikey=507-1896-6-ND, Digikey Link=https://www.digikey.ca/product-detail/en/bel-fuse-inc/0685T3000-01/507-1896-6-ND/4968212, MF="Bel Fuse Inc.", MP=0685T3000-01
P1: library part "CN HDR JTAG", "Connector Header Through Hole 14 position 0.050\" (1.27mm)", Rating=3.4A, ComponentLink1Description=Digikey, ComponentLink1URL=https://www.digikey.ca/product-detail/en/samtec-inc/FTSH-107-01-L-D-K/612-FTSH-107-01-L-D-K-ND/6693516, ComponentLink2Description=Datasheet, ComponentLink2URL=https://www.digikey.ca/en/datasheets/samtecinc/samtec-inc-ftsh-1xx-xx-xx-d-xx-xx-mkt, Digikey=612-FTSH-107-01-L-D-K-ND, Digikey Link=https://www.digikey.ca/product-detail/en/samtec-inc/FTSH-107-01-L-D-K/612-FTSH-107-01-L-D-K-ND/6693516, MF="Samtec Inc.", MP=FTSH-107-01-L-D-K, Price="5.14000 CAD"
P2: "Header, 7-Pin, Dual row", LatestRevisionDate=17-Jul-2002, LatestRevisionNote="Re-released for DXP Platform.", Publisher="Altium Limited"
P3 P4: "Header, 19-Pin, Dual row", LatestRevisionDate=17-Jul-2002, LatestRevisionNote="Re-released for DXP Platform.", Publisher="Altium Limited"
P5: "Header, 4-Pin", LatestRevisionDate=17-Jul-2002, LatestRevisionNote="Re-released for DXP Platform.", Publisher="Altium Limited"
P6 P7: "Header, 16-Pin, Dual row", LatestRevisionDate=17-Jul-2002, LatestRevisionNote="Re-released for DXP Platform.", Publisher="Altium Limited"
P8: library part "USB Micro B Receptacle", "USB - micro B USB 2.0 Receptacle Connector 5 Position Surface Mount, Right Angle; Through Hole", Rating="100VAC 1.8A", ComponentLink1Description=Digikey, ComponentLink1URL=https://www.digikey.ca/product-detail/en/amphenol-icc-fci/10118194-0001LF/609-4618-1-ND/2785382, ComponentLink2Description=Datasheet, ComponentLink2URL=https://www.digikey.ca/en/datasheets/amphenol-fci/amphenol-fci-io-usb-micro, Digikey=609-4618-1-ND, Digikey Link=https://www.digikey.ca/product-detail/en/amphenol-icc-fci/10118194-0001LF/609-4618-1-ND/2785382, MF="Amphenol ICC (FCI)", MP=10118194-0001LF, Price="0.62000 CAD"
P9: "Header, 2-Pin", LatestRevisionDate=17-Jul-2002, LatestRevisionNote="Re-released for DXP Platform.", Publisher="Altium Limited"
Q2 Q3: library part CMP-1048-00605-1, "Bipolar (BJT) Transistor NPN 40V 800mA 300MHz 350mW Surface Mount SOT-23-3", ComponentLink1Description="Manufacturer URL", ComponentLink1URL=http://www.onsemi.com/, ComponentLink2Description=Datasheet, ComponentLink2URL=http://www.onsemi.com/pub_link/Collateral/BSS64LT1-D.PDF, ComponentLink3Description="Package Specification", ComponentLink3URL=http://www.onsemi.cn/pub_link/Collateral/318-08.PDF, Digikey=BSR14TR-ND
R1 R2 R3 R4 R5 R6 R7 R19 R20 R21 R22 R23 R24 R25 R27 R28 R29 R30 R32 R33 R34 R35 R36 R37 R38 R39 R40 R41 R42 R43 R47 R48 R49 R50 R51 R52 R55 R57: library part "RES 0 0805", "RES SMD 0 OHM JUMPER 1/8W 0805", Package=0805, Rating=0.125W, Digikey=311-0.0ARCT-ND, Digikey Link=https://www.digikey.ca/products/en?keywords=311-0.0ARCT-ND, MF=Yageo, MP=RC0805JR-070RL, Price="0.058 CAD"
R9 R16 R53 R54: library part "RES 270 0805", "RES SMD 270 OHM 5% 1/8W 0805", Package=0805, Rating=0.125W, Digikey=311-270ARCT-ND, Digikey Link=https://www.digikey.ca/product-detail/en/yageo/RC0805JR-07270RL/311-270ARCT-ND/731238, MF=Yageo, MP=RC0805JR-07270RL, Price="0.054 CAD"
R12 R17: library part "RES 47k 0805", "RES SMD 47K OHM 1% 1/8W 0805", Package=0805, Rating=0.125W, Tolerance=1%, Digikey=311-47.0KCRCT-ND, Digikey Link=https://www.digikey.ca/product-detail/en/yageo/RC0805FR-0747KL/311-47.0KCRCT-ND/730920, MF=Yageo, MP=RC0805FR-0747KL, Price="0.061 CAD"
R15 R18 R31 R58: library part "RES 100k 0805", "RES SMD 100K OHM 1% 1/8W 0805", Package=0805, Rating=0.125W, Tolerance=1%, Digikey=311-100KCRCT-ND, Digikey Link=https://www.digikey.ca/products/en?keywords=311-100KCRCT-ND, MF=Yageo, MP=RC0805FR-07100KL, Price="0.058 CAD"
R26: library part "RES 330 0805", "RES SMD 330 OHM 1% 1/8W 0805", Package=0805, Rating=0.125W, Digikey=311-330CRCT-ND, Digikey Link=https://www.digikey.ca/products/en?keywords=311-330CRCT-ND, MF=Yageo, MP=RC0805FR-07330RL, Price="0.061 CAD"
R44 R45 R46: library part "RES 10k 0805", "RES SMD 10K OHM 1% 1/8W 0805", Package=0805, Rating=0.125W, Tolerance=1%, Digikey=311-10.0KCRCT-ND, Digikey Link=https://www.digikey.ca/products/en?keywords=311-10.0KCRCT-ND, MF=Yageo, MP=RC0805FR-0710KL, Price="0.061 CAD"
R56 R60: library part "RES 182 0805", "RES SMD 182 OHM 1% 1/8W 0805", Package=0805, Rating=0.125W, Tolerance=1%, Digikey=P182CCT-ND, Digikey Link=https://www.digikey.ca/product-detail/en/panasonic-electronic-components/ERJ-6ENF1820V/P182CCT-ND/118743, MF="Panasonic Electronic Components", MP=ERJ-6ENF1820V, Price="0.15 CAD"
R59: library part "RES 165k 0805", "165 kOhms ±1% 0.25W, 1/4W Chip Resistor 0805 (2012 Metric) Automotive AEC-Q200, Moisture Resistant Thick Film", Package=0805, Rating=0.25W, Digikey=2019-RK73H2ATTD1653FCT-ND, Digikey Link=https://www.digikey.ca/product-detail/en/koa-speer-electronics-inc/RK73H2ATTD1653F/2019-RK73H2ATTD1653FCT-ND/10235747, MF="KOA Speer Electronics, Inc.", MP=RK73H2ATTD1653F, Price="0.15 CAD"
S1 S2: library part "SW PUSH NO", "Pushbutton Switch SPST-NO Standard Through Hole", Rating="28V 0.3A", ComponentLink1Description=Digikey, ComponentLink1URL=https://www.digikey.ca/product-detail/en/e-switch/PB300STQ/EG5398-ND/6126493, ComponentLink2Description=Datasheet, ComponentLink2URL=https://sten-eswitch-13110800-production.s3.amazonaws.com/system/asset/product_line/data_sheet/222/PB300.pdf, Digikey=EG5398-ND, Digikey Link=https://www.digikey.ca/product-detail/en/e-switch/PB300STQ/EG5398-ND/6126493, MF=E-Switch, MP=PB300STQ, Price="3.40000 CAD"
U1: Package="144-LQFP (20x20)", Digikey=497-17721-ND, Digikey Link=https://www.digikey.ca/product-detail/en/stmicroelectronics/STM32H743ZIT6/497-17721-ND/7809238, MF=STMicroelectronics, MP=STM32H743ZIT6
U2: library part "REG LIN POS ADJ", "Linear Voltage Regulator IC  1 Output  500mA 8-SOIC", Package="8 SOIC", Rating=500mA, Digikey=296-21569-1-ND, Digikey Link=https://www.digikey.ca/product-detail/en/texas-instruments/TL5209DR/296-21569-1-ND/1427137, MF="Texas Instruments", MP=TL5209DR, Price="1.548 CAD"
U3: "Accelerometer, Gyroscope, Temperature, 6 Axis Sensor I²C, SPI Output", Package="LGA-14 STMicroelectronics", Availability=Unavailable, MF=STMicroelectronics, MP=LSM6DSLTR, Price=None, SnapEDA_Link=https://www.snapeda.com/parts/LSM6DSLTR/STMicroelectronics/view-part/550517/?ref=snap
XTAL1: library part "XTAL 25MHZ 8PF SMD", "25MHz ±50ppm Crystal 8pF 70 Ohms 2-SMD, No Lead", Frequency=25MHz, Load Capacitance=8pF, Package="2-SMD, No Lead", Digikey=644-1041-1-ND, Digikey Link=https://www.digikey.ca/product-detail/en/ndk-america-inc/NX5032GA-25.000000MHZ-LN-CD-1/644-1041-1-ND/1128913, ESR="70 Ohms", MF="NDK America, Inc.", MP=NX5032GA-25.000000MHZ-LN-CD-1, Price="0.95 CAD"
XTAL2: library part "XTAL 32.7680KHZ 12.5PF SMD", "32.768kHz ±20ppm Crystal 12.5pF 70 kOhms 2-SMD, No Lead", Frequency=32.768kHz, Load Capacitance=12.5pF, Package="2-SMD, No Lead", ComponentLink1Description=Digikey, ComponentLink1URL=https://www.digikey.ca/en/products/detail/ndk-america-inc/NX3215SA-32-768K-STD-MUA-8/2261469, ComponentLink2Description=Datasheet, ComponentLink2URL=https://media.digikey.com/datasheets/production/702868/1/NX3215SA-32-768K-STD-MUA-8.html, Digikey=644-1156-1-ND, Digikey Link=https://www.digikey.ca/en/products/detail/ndk-america-inc/NX3215SA-32-768K-STD-MUA-8/2261469?s=N4IgTCBcDaIGwBYEFoCMqCsc3IHIBEQBdAXyA, ESR="70 kOhms", MF="NDK America, Inc.", MP=NX3215SA-32.768K-STD-MUA-8, Price="1.04000 CAD"

## Via types
v1: diameter 1, hole 0.7, Top Layer to Bottom Layer, tented both sides, 390 vias
v2: diameter 1.27, hole 0.711, Top Layer to Bottom Layer, 4 vias

## Nets (pads, with @x,y where several pads share a name; then routed paths per layer and width w, separated by ;. In a path a pad name is that pad's centre, name@x,y a point inside that pad or via, vN(x,y) a via of type N, cw(c..) or ccw(c..) an arc to the next point about the centre after c; other vN are vias at no path point)
3V3: D10.C D11.C P1.3 P3.16 R55.2 R57.2 | length 156.6
  Top Layer w0.2: P3.16@4.2,60.49 5.21,60.49 6.6,59.1 6.6,58.5 6.75,58.35 18.4,58.35 18.54,58.49 18.54,75.057 18.8,75.317 18.8,79.5 17,81.3 17,82.7 ; P1.3@4.66,95.655 4.72,95.595 4.72,85.08 5.6,84.2 16.1,84.2 17,83.3 17,82.7 ; v1(33.7,77.4) 33.5,77.6 33.5,78.869 32.9,79.469 32.9,80.131 33.9,81.131 33.9,83.031 34.3,83.431 34.3,84.634 33.769,85.166 33.769,87.231 33.176,87.824 D10.C@29.7,87.824 D11.C@27.2,87.824 25.9,86.524 25.9,83.3 25.3,82.7 17,82.7 ; R55.2@45.24,73.8 v1@45.24,76.39 ; R57.2@80.3,83.24 R57.2@80.5,83.44
  Top Layer w0.5: R57.2@80.5,83.44 v1(80.5,84.7)
  Bottom Layer w0.2: v1@33.6,77.3 33.7,77.2 33.7,76.7 34,76.4 v1(45.2,76.4) 45.2,76.9 47.8,79.5 49.9,79.5 50.7,80.3 50.7,84.5 52.9,86.7 57.8,86.7 59.86,84.64 v1@80.6,84.64
3V3_PER: P2.11 P2.12 R9.1 R16.1 R57.1 | length 105
  Top Layer w0.2: R9.1@73.36,84.9 73.3,84.84 73.3,83.74 v1(74.04,83) ; v1@80.3,79.9 R57.1@80.3,81.36 ; v1(80.6,61.6) 81.1,61.6 81.5,62 84.7,62 v1@85.1,61.6
  Top Layer w0.5: R57.1@80.3,81.36 81.96,81.36 82.36,81.76 R16.1@82.36,84.8
  Signal Layer 1 w0.2: v1@73.98,82.9 73.98,80.32 74.6,79.7 v1(80.32,79.7) 80.32,70.78 v1@80.9,70.2 ; P2.11@76.28,1.8 P2.12@76.28,4.34 76.4,4.46 76.4,17.3 84.4,25.3 84.4,46.987 84.806,47.393 84.806,48.206 84.94,48.34 84.94,61.24 v1(85.1,61.4)
  Bottom Layer w0.2: v1@80.8,61.6 81.1,61.9 v1(81.1,70.5)
3V3_PWR_BRD: D11.A P5.1 R60.2 | length 9.5
  Top Layer w0.2: R60.2@24.64,91.24 24.703,91.176 26.1,91.176 ; P5.1@27.18,97.64 27.18,93.38 26.1,92.3 26.1,91.176 ; D11.A@27.2,91.176 26.1,91.176
3V3_USB_CHRG: C30.2 D10.A R56.2 R58.1 U2.OUT | length 79.7
  Top Layer w0.2: D10.A@29.7,91.176 v1(33.276,91.176) ; v1@53.34,88.64 v1(53.34,90.5) ; R58.1@64,83.86 62.14,83.86 60.94,85.06 v1(60.94,87.5) 61.74,87.5 63.04,88.8 69.26,88.8 C30.2@70.5,90.04 71.84,90.04 72.6,90.8 74.5,90.8 75.6,89.7 v1@75.6,89.2 ; v1(82.52,80.1) 85.31,80.1 U2.OUT@85.375,80.165 87.535,80.165 88,79.7 R56.2@88,77.04
  Bottom Layer w0.2: v1(33.276,91.176) 34.492,91.176 35.369,90.3 36.031,90.3 v1@53.3,90.3 ; v1(53.34,88.4) 60,88.4 v1@60.7,87.7 ; v1(75.52,89.2) 75.52,86.68 75.9,86.3 81.3,86.3 82.4,85.2 v1@82.4,80.3
3V3_VDD: C32.2 C33.2 P3.5 R45.1 R51.2 R55.1 S1.2 U1.VDD33USB U3.5 U3.8 | length 264.3
  Top Layer w0.2: P3.5@1.66,73.19 2.87,74.4 v1@15.9,74.4 ; U3.5@11.1,22.29 11.1,21.6 10.5,21 8.4,21 7.9,21.5 7.9,25.4 9.1,26.6 15.7,26.6 16.2,26.1 C32.2@16.2,23.89 ; U3.8@12.76,22.45 13.55,22.45 14.99,23.89 C32.2@16.2,23.89 ; C33.2@18.9,23.84 16.25,23.84 C32.2@16.2,23.89 ; v1(45.7,69.7) 45.7,69.766 43.36,72.105 R55.1@43.36,73.8 43.36,76.76 44,77.4 47.731,77.4 50.531,74.6 R45.1@51.02,74.6 ; U1.VDD33USB@61.725,53.45 70.25,53.45 71.49,54.69 74.99,54.69 77.44,57.14 R51.2@79.7,57.14 80.89,57.14 v1(81.24,56.79)
  Signal Layer 1 w0.2: v1(16.16,25.5) 16.16,27.26 19.1,30.2 19.1,70.1 ; v1(16.2,74.48) 19.1,71.58 19.1,70.1 ; v1@80,68.6 79.1,68.6 75.05,72.65 65.566,72.65 62.616,69.7 v1(45.7,69.7) 45.6,69.8 44.4,69.8 44.1,70.1 19.1,70.1
  Signal Layer 2 w0.2: v1(80.2,68.8) 80.2,62.331 79.8,61.931 79.8,58.23 v1(81.24,56.79) 81.55,57.1 82.6,57.1 89.44,50.26 89.44,35.54 86.1,32.2 v1(86.1,28.1)
  Bottom Layer w0.2: v1@86.2,28 86.2,27.9 89.16,24.94 S1.2@89.16,7
5V: D6.C D7.C P3.18 | length 41.6
  Top Layer w0.2: P3.18@4.2,57.95 18.75,57.95 18.94,58.14 18.94,74.891 19.2,75.151 19.2,80.824 D6.C@18.8,81.224 D7.C@22.2,81.224
5V_PWR_BRD: D7.A P5.2 R54.2 | length 16.4
  Top Layer w0.2: R54.2@20.24,91.3 20.44,91.5 22.2,91.5 ; D7.A@22.2,84.576 22.2,91.5 ; P5.2@24.64,97.64 24.64,93.54 23.5,92.4 23.1,92.4 22.2,91.5
5V_USB_CHRG: C28.2 C29.1 D5.C D6.A F1.2 R53.2 U2.EN U2.IN | length 98.2
  Top Layer w0.2: D6.A@18.8,84.576 v1@20.516,84.576 ; v1(28.8,84.4) 31.12,84.4 31.32,84.2 v1@33.1,84.2 ; v1(60.84,88.8) 60.14,88.1 60.14,79.36 60.8,78.7 61.376,78.7 D5.C@61.7,79.024 ; D5.C@61.9,78.824 61.9,76.5 62.9,75.5 ; C28.2@62.9,73.74 62.9,75.5 ; C29.1@65.5,73.78 65.5,75.3 65.3,75.5 ; v2(75.2,81) 74.4,80.2 R53.2@74.4,78.44 74.06,78.1 70,78.1 67.4,75.5 65.3,75.5 ; v1(83.52,82.2) 83.62,82.1 85.375,82.1 ; U2.IN@85.375,81.435 85.375,82.1 ; F1.2@88.64,86.5 86.54,84.4 85.8,84.4 85.375,83.975 U2.EN@85.375,82.705 85.375,82.1 ; 62.9,75.5 65.3,75.5
  Signal Layer 1 w0.2: v2(75.2,81) 82.9,81 83.6,81.7 v1@83.6,82.1
  Bottom Layer w0.2: v1(20.66,84.64) 29.16,84.64 v1@29.2,84.6 ; v1(33.16,84.24) 33.2,84.28 33.2,85.8 34.2,86.8 40.068,86.8 40.469,86.4 41.5,86.4 44.4,89.3 57.866,89.3 ; 57.866,89.3 60.5,89.3 v1@60.8,89
AGND: C1.1 C13.1 C14.1 C15.1 C16.1 P4.32 P5.3 R52.1 U1.VSSA | length 314.4
  Top Layer w0.2: v1(16.16,53.65) 16.16,53.04 17.3,51.9 v1@17.3,46.1 ; C13.1@19.06,35.495 19.064,35.492 19.064,33.936 19.25,33.75 24.75,33.75 ; v1@20.67,42.87 v1(20.67,46) ; C14.1@24.55,35.492 24.55,33.95 24.75,33.75 ; v1(28.8,41.8) 28.8,37.397 25.153,33.75 24.75,33.75 ; v1@37.55,44.2 38.3,44.95 U1.VSSA@40.275,44.95 ; C15.1@78.86,40.5 78.86,40.44 80.3,39 80.3,38.36 79.5,37.56 79.5,35 80,34.5 82.6,34.5 83.04,34.94 C1.1@83.04,35.8 83.04,36.38 82.1,37.32 82.1,38.64 82.82,39.36 83.56,39.36 84.44,40.24 C16.1@84.44,40.5 84.84,40.1 v1(86.655,40.1) ; v1@79.04,73.9 79.9,74.76 R52.1@80.6,74.76 ; v1@86.5,34.8 87.146,35.446 91.154,35.446 94.1,32.5 96.5,32.5 P4.32@97.8,33.8
  Signal Layer 1 w0.2: v1(37.6,44.1) 37.19,44.51 35.941,44.51 35.831,44.4 34.34,44.4 29.3,39.36 29.3,27.6 19.9,18.2 19.9,9.1 21.8,7.2 v1(61.7,7.2) ; v1(86.5,34.5) 86.5,36.1 87,36.6 87,39.77 v1@86.6,40.17
  Signal Layer 2 w0.2: v1@61.9,7.3 63.6,9 72.266,9 80.3,17.034 80.3,28.3 v1(86.5,34.5) ; v1(78.9,73.9) 78.9,52.7 82,49.6 82,43.62 85.52,40.1 v1(86.655,40.1)
  Bottom Layer w0.2: v1@16.2,53.69 16.2,69.3 13.9,71.6 13.9,81.7 12.1,83.5 12.1,86.9 22.1,96.9 P5.3@22.1,97.64 ; v1(17.26,45.99) v1@20.49,45.99 ; v1(20.67,42.8) 20.97,42.5 28.1,42.5 v1(28.8,41.8) ; v1@28.9,41.7 29.934,41.7 30.234,41.4 31.497,41.4 32.397,42.3 34.437,42.3 34.837,41.9 36.163,41.9 37.6,43.337 v1(37.6,44.1)
BOOT0: P3.7 R44.2 U1.BOOT0 | length 59.5
  Top Layer w0.2: P3.7@1.66,70.65 2.91,71.9 v1@16.2,71.9 ; R44.2@40.7,73.26 40.7,72.24 41.24,71.7 43.2,71.7 44.7,70.2 v1(44.7,69) 45.25,68.45 45.25,65.081 45.1,64.931 45.1,64.269 45.25,64.119 U1.BOOT0@45.25,61.925
  Bottom Layer w0.2: v1(16.5,71.88) 19.52,71.88 21.3,70.1 36.372,70.1 36.672,70.4 43.9,70.4 44.6,69.7 44.6,69.1 v1(44.7,69)
GND: C2.2 C3.1 C4.2 C5.2 C6.2 C7.2 C8.1 C9.1 C10.1 C11.1 C12.1 C17.1 C18.1 C19.1 C20.1 C21.1 C22.1 C23.1 C24.1 C25.1 C26.1 C27.1 C28.1 C29.2 C30.1 C31.1 C32.1 C33.1 D4.2 D5.A D8.2 D9.2 D12.2 P1.5 P1.7 P1.11 P2.13 P2.14 P3.8 P3.19 P3.20 P3.22 P4.9 P4.20 P5.4 P6.11 P6.22 P7.1 P7.16 P7.25 P8.5 P8.S1 P8.S2 P8.S3 P8.S4 P8.S5 P8.S6 Q2.2 Q3.2 R15.2 R18.2 R31.2 R44.1 R46.1 R52.2 R59.2 S2.1 U1.VSS U2.GND U3.2 U3.3 U3.6 U3.7 | length 922
  Top Layer w0.2: v1@7.4,55.8 8.05,56.45 v1(17.66,56.45) ; U3.3@10.44,22.95 11.45,22.95 ; U3.2@10.44,23.45 10.95,23.45 11.45,22.95 ; U3.7@12.1,22.29 12.1,21.2 ; D8.2@16.4,97.65 18,97.65 ; P7.1@18,2 14.9,2 12,4.9 8.5,4.9 7.2,6.2 S2.1@7.2,7.2 7.2,16.16 C3.1@7.24,16.2 7.34,16.1 8.8,16.1 v2(9.5,16.8) 12.1,19.4 12.1,21.2 ; C33.1@18.9,21.96 16.25,21.96 C32.1@16.2,22.01 15.39,21.2 12.1,21.2 ; P5.4@19.56,97.64 19.55,97.65 18,97.65 ; C5.2@23.1,46.04 23.1,46.8 ; C4.2@23.1,47.76 23.1,46.8 ; C6.2@24.68,59.66 24.84,59.5 v1(27.14,59.5) ; C7.2@24.78,56.84 26.04,56.84 v2@26.9,57.7 ; v2@26,46.8 23.1,46.8 ; v2(27.2,57.6) 27.7,57.1 31.26,57.1 31.96,56.4 34.3,56.4 34.5,56.2 34.5,52.95 35,52.45 U1.VSS@40.275,52.45 ; C12.1@28.3,69.04 v1@28.3,73.8 ; 33.6,89.203 34.169,88.634 34.169,85.331 35,84.5 35,83.566 34.3,82.866 34.3,80.4 v1(33.7,79.8) ; 33.6,89.203 33.5,89.303 33.5,90.297 33.579,90.376 33.608,90.376 34.076,90.845 34.076,90.873 34.2,90.997 34.2,91.297 34.7,91.797 34.7,92.8 34,93.5 30,93.5 29.7,93.8 29.7,98.8 29.2,99.3 18.4,99.3 18,98.9 18,97.65 ; v1@39.4,79.7 39.1,79.4 39.1,76.8 ; R44.1@40.7,75.14 40.7,75.2 39.1,76.8 ; R46.1@42.1,68.84 39.1,71.84 39.1,76.8 ; U1.VSS@42.75,40.475 v1@42.75,42.71 ; v1(49,42.71) 49.25,42.46 U1.VSS@49.25,40.475 ; v1@49.25,60.3 U1.VSS@49.25,61.925 ; U1.VSS@54.25,40.475 54.25,36.83 55.503,35.577 C23.1@55.503,35.446 C22.1@55.503,33.238 C20.1@55.503,31.029 C24.1@55.503,28.821 C27.1@55.503,26.613 C26.1@55.503,24.405 55.503,21.857 C10.1@55.56,21.8 55.56,18.74 57.16,17.14 C9.1@57.16,16 57.16,15.14 57.5,14.8 60.5,14.8 ; v1@54.25,60.55 U1.VSS@54.25,61.925 ; v1@56.5,53.2 56.3,53 56.3,49.8 58.65,47.45 U1.VSS@61.725,47.45 ; v1(58.9,59.2) 59.16,59.2 59.41,59.45 U1.VSS@61.725,59.45 ; v1@59.6,77.5 59.1,77 59.1,76.126 60.4,74.826 60.4,72.9 61.44,71.86 C28.1@62.9,71.86 65.46,71.86 65.47,71.85 v1(67.2,71.85) ; v1(59.95,53.2) 60.4,53.2 60.65,52.95 U1.VSS@61.725,52.95 70.5,52.95 71.84,54.29 75.74,54.29 v1@76.1,54.65 ; v1(61.1,83.6) 61.9,82.8 D5.A@61.9,82.176 63.424,82.176 64.7,80.9 ; C19.1@61.14,35.5 61.24,35.4 61.24,31.1 61.24,26.6 C11.1@61.24,21.8 61.24,15.54 60.5,14.8 ; v1(62.6,14.8) 60.5,14.8 ; R59.2@65.7,79.64 65.7,79.9 65.3,80.3 ; D4.2@71.4,80.3 65.3,80.3 ; v1@73.36,89.82 71.7,88.16 C30.1@70.5,88.16 64.16,88.16 62.4,86.4 62.4,85.2 62.8,84.8 65.3,84.8 65.6,84.5 C31.1@66.86,84.5 66.86,82.96 64.8,80.9 64.7,80.9 ; D12.2@75.8,96.45 75.8,98.4 76.2,98.8 88.2,98.8 ; P2.13@78.82,1.8 P2.14@78.82,4.34 78.82,12.22 81.24,14.64 C2.2@81.24,18.5 81.24,19.54 81.6,19.9 84.4,19.9 84.84,19.46 R31.2@84.84,18.4 ; R52.2@80.6,76.64 80.6,77.2 v1@81.6,78.2 ; R15.2@86.14,67.7 v1@87.699,67.7 ; Q3.2@88.97,97.55 88.92,97.6 88,97.6 ; Q2.2@89.1,93.75 88.25,93.75 87.8,94.2 87.8,95.73 88,95.93 88,97.6 ; U2.GND@90.825,78.895 90.825,79.5 ; R18.2@92.74,97.4 92.74,98.46 92.4,98.8 ; v1(92.785,79.3) 92.585,79.5 90.825,79.5 ; P8.5@94.2,91.6 P8.S2@94.2,92.8 94.8,92.8 95.8,93.8 P8.S6@96.9,93.8 ; 11.45,22.95 11.6,22.8 U3.6@11.6,22.29 11.6,21.2 12.1,21.2 ; 64.7,80.9 65.3,80.3 ; 88,97.6 88,98.6 88.2,98.8 ; 88.2,98.8 92.4,98.8 ; 90.825,79.5 U2.GND@90.825,80.165 U2.GND@90.825,81.435 U2.GND@90.825,82.705 90.825,83.025 91.125,83.325 95.775,83.325 D9.2@96.1,83.65 96.1,84.7 96.9,85.5 P8.S3@96.9,86.8 P8.S4@96.9,89.3 P8.S5@96.9,91.3 P8.S6@96.9,93.8 ; 92.4,98.8 95.3,98.8 96.9,97.2 P8.S6@96.9,93.8
  Signal Layer 1 w0.2: v1(42.6,18.7) 53,18.7 56.9,14.8 v1(62.6,14.8) ; v1(54.4,60.2) 54.4,61.8 59.6,67 60.481,67 65.331,71.85 v1(67.2,71.85) ; v1(76.24,54.79) 82.3,60.85 82.3,61.531 82.769,62 83.45,62 84.3,62.85 84.3,64.12 84.53,64.35 86.05,64.35 87.2,63.2 88.3,63.2 88.7,63.6 ; v1(81.62,78.3) 92.5,78.3 92.8,78.6 v1@92.8,79.2 ; v1(87.7,67.701) 87.7,66.7 88.7,65.7 88.7,63.6 ; v1(92.14,55.19) 92.14,60.06 88.7,63.5 88.7,63.6
  Signal Layer 2 w0.2: P3.22@4.2,52.87 6.73,52.87 ; v2(9.5,16.8) 12.2,16.8 ; 25.7,16.8 34.5,16.8 36.4,18.7 v1@42.44,18.7 ; v1(58.9,59.2) 58.85,59.15 58.85,55.65 59.95,54.55 v1(59.95,53.2) ; 78.7,7.2 78.7,4.46 P2.14@78.82,4.34 ; 81.2,13.4 v1(81.2,14.8)
  Bottom Layer w0.2: P1.5@5.93,95.655 5.93,93.57 6.5,93 6.7,93 ; P1.7@7.2,95.655 7.2,93 ; v1(7.46,55.75) 7.12,55.41 P3.20@4.2,55.41 ; v2@9.3,16.9 8.4,17.8 5.6,17.8 2.9,20.5 2.9,51.7 4.07,52.87 P3.22@4.2,52.87 ; P1.11@9.74,95.655 9.74,93.04 9.7,93 ; v1@17.6,56.5 20.6,59.5 v1(27.14,59.5) ; P5.4@19.56,97.64 18.08,97.64 18.02,97.7 ; v2(27.2,57.6) v1@27.2,59.4 ; v1(28.3,73.9) 28.3,74 29.9,75.6 29.9,92.634 29.1,93.434 29.1,97.166 29.9,97.966 29.9,98.3 28.9,99.3 ; v1@33.9,79.8 v1(39.7,79.8) ; P7.16@35.78,4.54 35.78,4.32 37.1,3 37.1,1 37.4,0.7 49.4,0.7 ; P6.11@44.22,95.1 44.22,95.12 45.5,96.4 45.5,98.6 44.8,99.3 ; P7.25@48.48,2 48.48,1.62 49.4,0.7 ; v1@48.89,42.71 48.79,42.61 43,42.61 v1(42.9,42.71) 39.09,42.71 38.8,43 38.8,44.8 36.1,47.5 34.8,47.5 34.36,47.94 34.36,49.681 33.892,50.15 33.229,50.15 30.079,47 26.1,47 v2(25.8,46.7) 23.7,44.6 11.466,44.6 10.416,45.65 5.95,45.65 5.6,46 5.6,52.4 5.13,52.87 P3.22@4.2,52.87 ; v1(49.6,60.2) v1(54.4,60.2) 59,60.2 59.1,60.1 v1@59.1,59.3 ; v1(56.45,53.1) v1@59.8,53.1 ; P6.22@56.92,97.64 56.92,98.38 56.1,99.2 ; v1(59.65,77.6) 59.65,81.85 v1@61.1,83.3 ; v1(62.6,14.8) v1@81.1,14.8 ; v1(73.34,89.9) 73.34,99.16 v1@73.3,99.2 ; P2.13@78.82,1.8 77.72,0.7 49.4,0.7 ; v1(87.7,67.701) 93.661,61.74 P4.9@95.26,61.74 ; v1@92.1,55.2 92.1,52.2 93.97,50.33 96.37,50.33 97.66,49.04 P4.20@97.8,49.04 ; P8.S1@94.2,87.8 94.2,87.7 95.1,86.8 P8.S3@96.9,86.8 ; P8.S6@96.9,93.8 96.9,97.1 94.8,99.2 v1@73.3,99.2 ; P3.22@4.2,52.87 P3.20@4.2,55.41 ; P3.20@4.2,55.41 P3.19@1.66,55.41 1.39,55.41 0.4,56.4 0.4,69.1 0.66,69.36 2.91,69.36 P3.8@4.2,70.65 6.05,70.65 6.7,71.3 6.7,93 ; 6.7,93 7.2,93 ; 7.2,93 9.7,93 ; 9.7,93 17.4,93 18.02,93.62 18.02,97.7 ; 18.02,97.7 18.02,98.72 18.6,99.3 28.9,99.3 ; 28.9,99.3 44.8,99.3 ; 44.8,99.3 56,99.3 56.1,99.2 ; 56.1,99.2 v1@73.3,99.2
  other v1: 73.34,99.2
I2C1_SCL: U1.PB6 U3.13 | length 71.1
  Top Layer w0.2: v1(11.56,25.5) 11.6,25.46 U3.13@11.6,24.11 ; v1@45.9,64.42 45.9,63.1 46.25,62.75 U1.PB6@46.25,61.925
  Signal Layer 2 w0.2: v1@11.4,25.7 10.7,26.4 10.7,46.684 14.316,50.3 36.866,50.3 39.1,52.534 39.1,57.689 45,63.589 45,63.6 v1(46,64.6)
I2C1_SDA: U1.PB9 U3.14 | length 69.1
  Top Layer w0.2: v1(10.16,25.6) 10.16,25.54 11.1,24.6 U3.14@11.1,24.11 ; v1@44.1,63.8 44.1,63.6 44.25,63.45 U1.PB9@44.25,61.925
  Signal Layer 2 w0.2: v1@10.3,25.9 10.3,46.85 14.15,50.7 36.7,50.7 38.7,52.7 38.7,58.42 v1(44.2,63.92)
JTDO: P1.8 R22.1 | length 66.9
  Top Layer w0.2: P1.8@7.2,96.925 7.2,98.74 7.66,99.2 12.8,99.2 14.1,97.9 14.1,87.1 15,86.2 15.091,86.2 15.56,85.731 15.56,85.64 v1@16.9,84.3 ; v1(47,72.2) 47.4,71.8 R22.1@47.4,68.58
  Bottom Layer w0.2: v1(17.16,84.4) 17.16,79.84 18.9,78.1 18.9,75.8 22.5,72.2 35.643,72.2 35.843,72.4 46.6,72.4 v1@46.8,72.2